# Altium PCB FPv1.3.2.PcbDoc (part 8 of 9)
Units mm, origin at the board's own origin, x right, y up, seen from the top; angles counter-clockwise.
Board outline 81.28 x 53.34 mm, 4 copper layers (Top Layer, GROUND PLANE, POWER PLANE, Bottom Layer); 98 components, 183 nets, 614 pads, 312 vias.
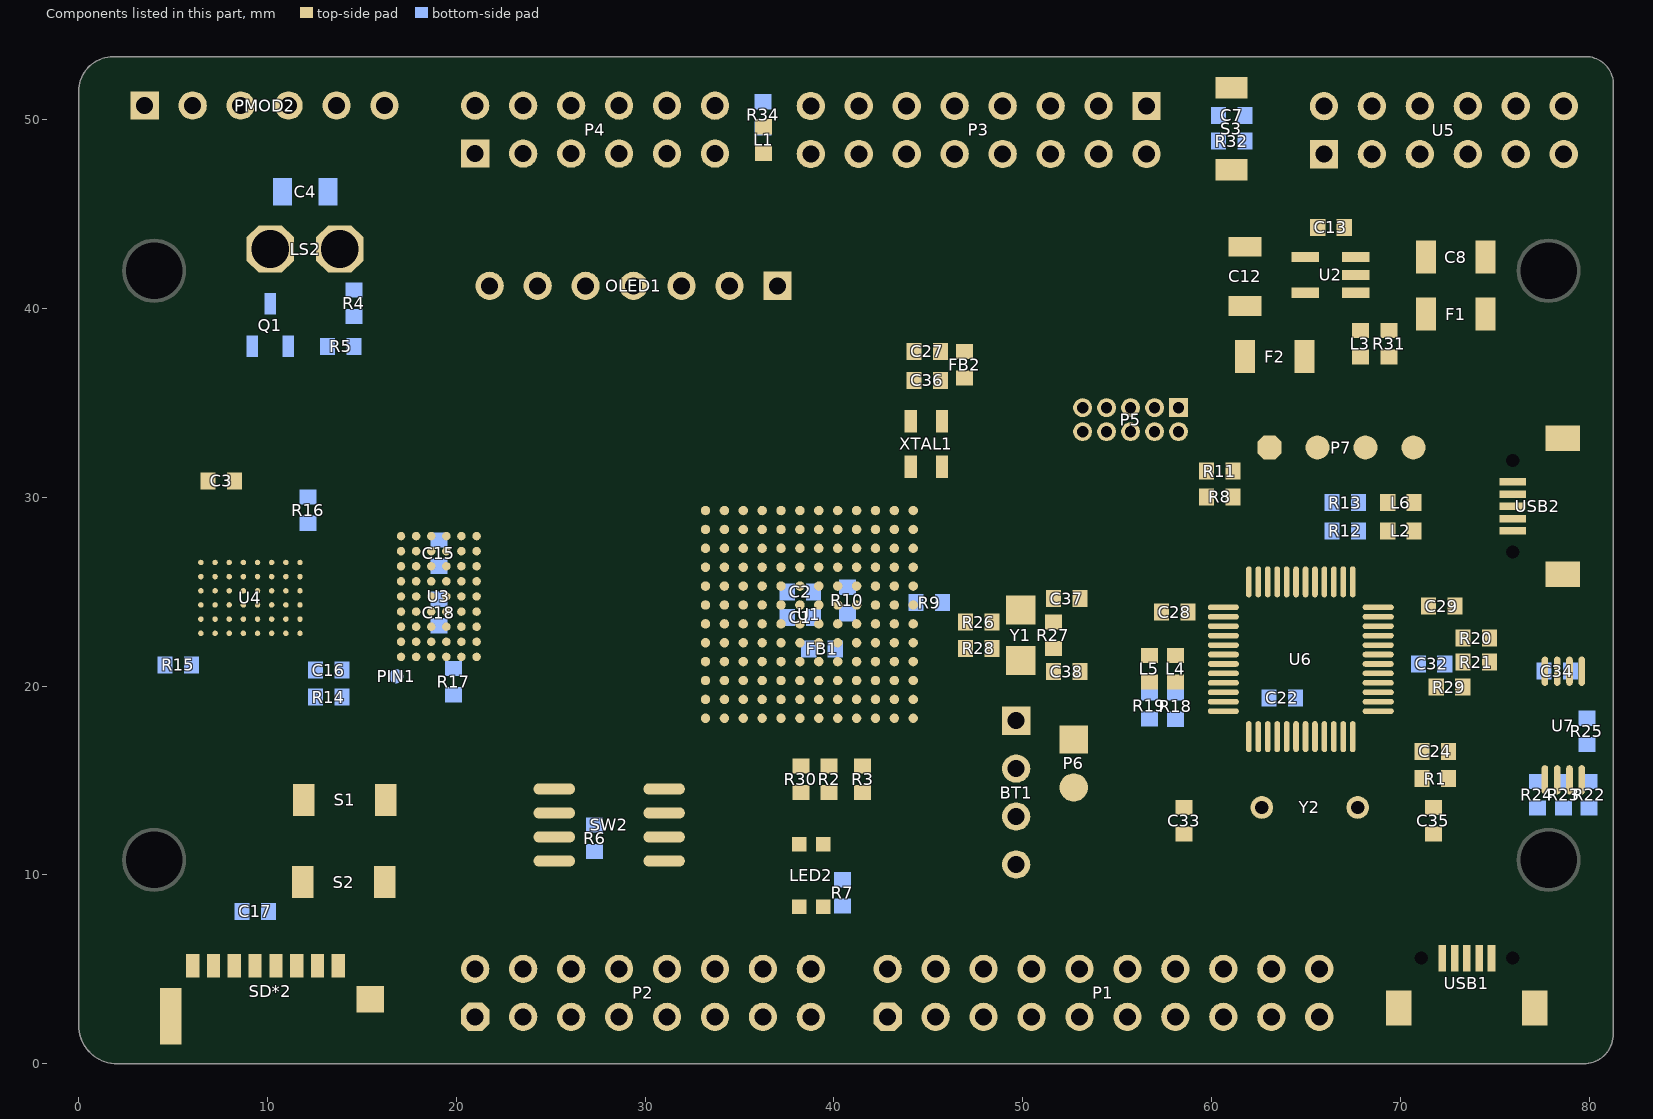
[diagram p10: the components of this part, seen from the top]

## Via types
v1: diameter 0.403, hole 0.2, Top Layer to Bottom Layer, tented both sides, 261 vias
v2: diameter 0.503, hole 0.3, Top Layer to Bottom Layer, tented both sides, 25 vias
v3: diameter 0.6, hole 0.4, Top Layer to Bottom Layer, tented both sides, 11 vias
v4: diameter 0.508, hole 0.33, Top Layer to Bottom Layer, tented both sides, 5 vias
v5: diameter 0.703, hole 0.4, Top Layer to Bottom Layer, tented both sides, 3 vias
v6: diameter 0.603, hole 0.4, Top Layer to Bottom Layer, tented both sides, 2 vias
v7: diameter 0.503, hole 0.25, Top Layer to Bottom Layer, tented both sides, 2 vias
v8: diameter 0.6, hole 0.24, Top Layer to Bottom Layer, tented both sides, 1 vias
v9: diameter 0.508, hole 0.349, Top Layer to Bottom Layer, tented both sides, 1 vias
v10: diameter 0.603, hole 0.3, Top Layer to Bottom Layer, tented both sides, 1 vias

## Nets (pads, with @x,y where several pads share a name; then routed paths per layer and width w, separated by ;. In a path a pad name is that pad's centre, name@x,y a point inside that pad or via, vN(x,y) a via of type N, cw(c..) or ccw(c..) an arc to the next point about the centre after c; other vN are vias at no path point) (continued)
copper on no net: (continued)
  Top Layer w0.025: 52.349,39.98 52.4,39.98 ; 52.349,40.005 52.4,40.005 ; 52.349,40.03 52.4,40.03 ; 52.349,40.056 52.4,40.056 ; 52.349,40.081 52.4,40.081 ; 52.349,40.107 52.4,40.107 ; 52.349,40.132 52.4,40.132 ; 52.349,40.157 52.4,40.157 ; 52.349,40.183 52.4,40.183 ; 52.349,40.208 52.4,40.208 ; 52.349,40.234 52.4,40.234 ; 52.349,40.259 52.4,40.259 ; 52.349,40.284 52.4,40.284 ; 52.349,40.31 52.4,40.31 ; 52.349,40.335 52.4,40.335 ; 52.349,40.361 52.4,40.361 ; 52.349,40.386 52.4,40.386 ; 52.375,39.7 52.426,39.7 ; 52.375,39.726 52.426,39.726 ; 52.375,39.751 52.426,39.751 ; 52.375,39.776 52.426,39.776 ; 52.375,39.802 52.426,39.802 ; 52.375,39.827 52.426,39.827 ; 52.375,39.853 52.426,39.853 ; 52.375,39.878 52.426,39.878 ; 52.375,39.903 52.426,39.903 ; 52.375,39.929 52.4,39.929 ; 52.375,39.954 52.4,39.954 ; 52.375,40.411 52.4,40.411 ; 52.375,40.437 52.4,40.437 ; 52.375,40.462 52.4,40.462 ; 52.375,40.488 52.426,40.488 ; 52.375,40.513 52.426,40.513 ; 52.375,40.538 52.426,40.538 ; 52.375,40.564 52.426,40.564 ; 52.375,40.589 52.426,40.589 ; 52.375,40.615 52.426,40.615 ; 52.375,40.64 52.426,40.64 ; 52.375,40.665 52.426,40.665 ; 52.4,39.522 52.451,39.522 ; 52.4,39.548 52.451,39.548 ; 52.4,39.573 52.451,39.573 ; 52.4,39.599 52.451,39.599 ; 52.4,39.624 52.451,39.624 ; 52.4,39.649 52.451,39.649 ; 52.4,39.675 52.426,39.675 ; 52.4,40.691 52.426,40.691 ; 52.4,40.716 52.451,40.716 ; 52.4,40.742 52.451,40.742 ; 52.4,40.767 52.451,40.767 ; 52.4,40.792 52.451,40.792 ; 52.4,40.818 52.451,40.818 ; 52.4,40.843 52.451,40.843 ; 52.426,39.395 52.476,39.395 ; 52.426,39.421 52.476,39.421 ; 52.426,39.446 52.476,39.446 ; 52.426,39.472 52.476,39.472 ; 52.426,39.497 52.476,39.497 ; 52.426,40.869 52.451,40.869 ; 52.426,40.894 52.476,40.894 ; 52.426,40.919 52.476,40.919 ; 52.426,40.945 52.476,40.945 ; 52.426,40.97 52.476,40.97 ; 52.451,39.294 52.502,39.294 ; 52.451,39.319 52.502,39.319 ; 52.451,39.345 52.502,39.345 ; 52.451,39.37 52.502,39.37 ; 52.451,40.996 52.476,40.996 ; 52.451,41.021 52.502,41.021 ; 52.451,41.046 52.502,41.046 ; 52.451,41.072 52.502,41.072 ; 52.451,41.097 52.502,41.097 ; 52.476,39.192 52.527,39.192 ; 52.476,39.218 52.527,39.218 ; 52.476,39.243 52.527,39.243 ; 52.476,39.268 52.527,39.268 ; 52.476,41.123 52.527,41.123 ; 52.476,41.148 52.527,41.148 ; 52.476,41.173 52.527,41.173 ; 52.476,41.199 52.527,41.199 ; 52.502,39.091 52.553,39.091 ; 52.502,39.116 52.553,39.116 ; 52.502,39.141 52.553,39.141 ; 52.502,39.167 52.553,39.167 ; 52.502,41.224 52.553,41.224 ; 52.502,41.25 52.553,41.25 ; 52.502,41.275 52.553,41.275 ; 52.527,39.014 52.578,39.014 ; 52.527,39.04 52.578,39.04 ; 52.527,39.065 52.578,39.065 ; 52.527,41.3 52.578,41.3 ; 52.527,41.326 52.578,41.326 ; 52.527,41.351 52.578,41.351 ; 52.527,41.377 52.603,41.377 ; 52.553,38.938 52.603,38.938 ; 52.553,38.964 52.603,38.964 ; 52.553,38.989 52.603,38.989 ; 52.553,41.402 52.603,41.402 ; 52.553,41.427 52.603,41.427 ; 52.553,41.453 52.629,41.453 ; 52.578,38.862 52.629,38.862 ; 52.578,38.887 52.629,38.887 ; 52.578,38.913 52.629,38.913 ; 52.578,41.478 52.629,41.478 ; 52.578,41.504 52.629,41.504 ; 52.578,41.529 52.654,41.529 ; 52.603,38.786 52.68,38.786 ; 52.603,38.811 52.654,38.811 ; 52.603,38.837 52.654,38.837 ; 52.603,41.554 52.654,41.554 ; 52.603,41.58 52.654,41.58 ; 52.629,38.735 52.68,38.735 ; 52.629,38.76 52.68,38.76 ; 52.629,40.259 52.68,40.259 ; 52.629,40.284 52.68,40.284 ; 52.629,40.31 52.68,40.31 ; 52.629,40.335 52.68,40.335 ; 52.629,40.361 52.68,40.361 ; 52.629,41.605 52.68,41.605 ; 52.629,41.631 52.68,41.631 ; 52.629,41.656 52.705,41.656 ; 52.654,38.659 52.73,38.659 ; 52.654,38.684 52.705,38.684 ; 52.654,38.71 52.705,38.71 ; 52.654,40.208 52.73,40.208 ; 52.654,40.234 52.705,40.234 ; 52.654,40.386 52.705,40.386 ; 52.654,40.411 52.73,40.411 ; 52.654,41.681 52.705,41.681 ; 52.654,41.707 52.705,41.707 ; 52.68,38.608 52.756,38.608 ; 52.68,38.633 52.73,38.633 ; 52.68,39.649 53.162,39.649 ; 52.68,39.675 53.137,39.675 ; 52.68,39.954 53.162,39.954 ; 52.68,39.98 53.162,39.98 ; 52.68,40.183 52.781,40.183 ; 52.68,40.437 53.111,40.437 ; 52.68,40.691 52.781,40.691 ; 52.68,40.716 52.807,40.716 ; 52.68,40.97 52.807,40.97 ; 52.68,40.996 52.781,40.996 ; 52.68,41.732 52.73,41.732 ; 52.68,41.758 52.73,41.758 ; 52.705,38.557 52.756,38.557 ; 52.705,38.583 52.756,38.583 ; 52.705,40.157 53.111,40.157 ; 52.705,40.462 53.111,40.462 ; 52.705,40.665 52.883,40.665 ; 52.705,41.021 52.857,41.021 ; 52.705,41.783 52.756,41.783 ; 52.705,41.808 52.756,41.808 ; 52.73,38.506 52.781,38.506 ; 52.73,38.532 52.781,38.532 ; 52.73,39.497 52.934,39.497 ; 52.73,39.522 52.807,39.522 ; 52.73,40.742 52.908,40.742 ; 52.73,40.945 52.908,40.945 ; 52.73,41.834 52.781,41.834 ; 52.73,41.859 52.781,41.859 ; 52.73,41.885 52.807,41.885 ; 52.756,38.456 52.807,38.456 ; 52.756,38.481 52.807,38.481 ; 52.756,40.132 53.111,40.132 ; 52.756,41.91 52.807,41.91 ; 52.756,41.935 52.832,41.935 ; 52.781,38.405 52.832,38.405 ; 52.781,38.43 52.832,38.43 ; 52.781,39.141 52.832,39.141 ; 52.781,39.167 52.883,39.167 ; 52.781,41.046 52.984,41.046 ; 52.781,41.961 52.832,41.961 ; 52.781,41.986 52.857,41.986 ; 52.807,38.354 52.883,38.354 ; 52.807,38.379 52.857,38.379 ; 52.807,39.192 52.908,39.192 ; 52.807,39.472 53.061,39.472 ; 52.807,40.64 52.984,40.64 ; 52.807,42.012 52.857,42.012 ; 52.832,38.303 52.908,38.303 ; 52.832,38.329 52.883,38.329 ; 52.832,39.014 52.959,39.014 ; 52.832,40.767 53.01,40.767 ; 52.832,40.919 53.01,40.919 ; 52.832,42.037 52.883,42.037 ; 52.832,42.062 52.883,42.062 ; 52.857,38.252 52.934,38.252 ; 52.857,38.278 52.908,38.278 ; 52.857,38.989 52.883,38.989 ; 52.857,39.04 53.01,39.04 ; 52.857,39.218 52.959,39.218 ; 52.857,42.088 52.908,42.088 ; 52.857,42.113 52.908,42.113 ; 52.883,38.227 52.934,38.227 ; 52.883,39.243 53.01,39.243 ; 52.883,39.395 52.934,39.395 ; 52.883,39.421 52.934,39.421 ; 52.883,39.446 53.188,39.446 ; 52.883,41.072 53.086,41.072 ; 52.883,42.139 52.934,42.139 ; 52.883,42.164 52.959,42.164 ; 52.908,38.176 52.984,38.176 ; 52.908,38.202 52.959,38.202 ; 52.908,39.268 53.035,39.268 ; 52.908,39.294 52.959,39.294 ; 52.908,39.319 52.959,39.319 ; 52.908,39.345 52.934,39.345 ; 52.908,39.37 52.934,39.37 ; 52.908,39.7 52.959,39.7 ; 52.908,39.726 52.959,39.726 ; 52.908,39.751 52.959,39.751 ; 52.908,39.776 52.959,39.776 ; 52.908,39.802 52.959,39.802 ; 52.908,39.827 52.959,39.827 ; 52.908,39.853 52.959,39.853 ; 52.908,39.878 52.959,39.878 ; 52.908,39.903 52.959,39.903 ; 52.908,39.929 52.959,39.929 ; 52.908,40.615 53.086,40.615 ; 52.908,42.189 52.959,42.189 ; 52.934,38.125 53.01,38.125 ; 52.934,38.151 52.984,38.151 ; 52.934,39.065 53.086,39.065 ; 52.934,40.792 53.086,40.792 ; 52.934,40.894 53.086,40.894 ; 52.934,42.215 52.984,42.215 ; 52.934,42.24 53.01,42.24 ; 52.959,38.1 53.01,38.1 ; 52.959,38.71 53.035,38.71 ; 52.959,38.735 53.086,38.735 ; 52.959,38.76 53.162,38.76 ; 52.959,42.266 53.01,42.266 ; 52.959,42.291 53.035,42.291 ; 52.984,38.049 53.061,38.049 ; 52.984,38.075 53.035,38.075 ; 52.984,38.786 53.061,38.786 ; 52.984,38.811 53.061,38.811 ; 52.984,39.091 53.137,39.091 ; 52.984,39.294 53.086,39.294 ; 52.984,40.589 53.162,40.589 ; 52.984,41.097 53.162,41.097 ; 52.984,42.316 53.035,42.316 ; 53.01,38.024 53.061,38.024 ; 53.01,38.837 53.086,38.837 ; 53.01,40.818 53.162,40.818 ; 53.01,40.869 53.137,40.869 ; 53.01,42.342 53.061,42.342 ; 53.01,42.367 53.086,42.367 ; 53.035,37.973 53.111,37.973 ; 53.035,37.998 53.086,37.998 ; 53.035,38.862 53.086,38.862 ; 53.035,38.887 53.111,38.887 ; 53.035,39.319 53.137,39.319 ; 53.035,42.393 53.111,42.393 ; 53.061,37.948 53.137,37.948 ; 53.061,38.913 53.137,38.913 ; 53.061,39.116 53.264,39.116 ; 53.061,39.345 53.162,39.345 ; 53.061,39.421 53.213,39.421 ; 53.061,42.418 53.111,42.418 ; 53.061,42.443 53.137,42.443 ; 53.086,37.897 53.162,37.897 ; 53.086,37.922 53.137,37.922 ; 53.086,38.786 53.213,38.786 ; 53.086,38.938 53.137,38.938 ; 53.086,38.964 53.162,38.964 ; 53.086,40.564 53.162,40.564 ; 53.086,40.843 53.137,40.843 ; 53.086,41.123 53.162,41.123 ; 53.086,42.469 53.162,42.469 ; 53.111,37.871 53.188,37.871 ; 53.111,38.989 53.188,38.989 ; 53.111,39.141 53.289,39.141 ; 53.111,39.37 53.213,39.37 ; 53.111,42.494 53.162,42.494 ; 53.137,37.846 53.213,37.846 ; 53.137,38.811 53.289,38.811 ; 53.137,39.014 53.188,39.014 ; 53.137,42.52 53.188,42.52 ; 53.137,42.545 53.213,42.545 ; 53.162,37.821 53.213,37.821 ; 53.162,39.04 53.213,39.04 ; 53.162,39.065 53.238,39.065 ; 53.162,39.395 53.213,39.395 ; 53.162,42.57 53.238,42.57 ; 53.188,37.77 53.264,37.77 ; 53.188,37.795 53.238,37.795 ; 53.188,38.227 53.264,38.227 ; 53.188,38.252 53.238,38.252 ; 53.188,38.278 53.238,38.278 ; 53.188,38.303 53.238,38.303 ; 53.188,38.329 53.264,38.329 ; 53.188,39.091 53.264,39.091 ; 53.188,39.167 53.289,39.167 ; 53.188,42.596 53.264,42.596 ; 53.213,37.744 53.289,37.744 ; 53.213,38.176 53.289,38.176 ; 53.213,38.202 53.264,38.202 ; 53.213,38.354 53.289,38.354 ; 53.213,38.837 53.34,38.837 ; 53.213,42.621 53.264,42.621 ; 53.238,37.719 53.315,37.719 ; 53.238,38.151 53.315,38.151 ; 53.238,38.379 53.315,38.379 ; 53.238,39.192 53.264,39.192 ; 53.238,42.647 53.289,42.647 ; 53.238,42.672 53.315,42.672 ; 53.264,37.694 53.315,37.694 ; 53.264,38.125 53.492,38.125 ; 53.264,38.405 53.34,38.405 ; 53.264,38.862 53.391,38.862 ; 53.264,42.697 53.34,42.697 ; 53.289,37.643 53.365,37.643 ; 53.289,37.668 53.34,37.668 ; 53.289,38.43 53.365,38.43 ; 53.289,42.723 53.365,42.723 ; 53.315,37.617 53.391,37.617 ; 53.315,38.1 53.442,38.1 ; 53.315,38.456 53.391,38.456 ; 53.315,42.748 53.391,42.748 ; 53.34,37.592 53.416,37.592 ; 53.34,38.481 53.416,38.481 ; 53.34,38.887 53.391,38.887 ; 53.34,42.774 53.416,42.774 ; 53.365,37.567 53.442,37.567 ; 53.365,38.506 53.442,38.506 ; 53.365,42.799 53.416,42.799 ; 53.391,37.541 53.467,37.541 ; 53.391,38.532 53.467,38.532 ; 53.391,39.903 53.67,39.903 ; 53.391,39.929 53.67,39.929 ; 53.391,39.954 53.67,39.954 ; 53.391,39.98 53.67,39.98 ; 53.391,40.005 53.67,40.005 ; 53.391,40.03 53.67,40.03 ; 53.391,40.056 53.67,40.056 ; 53.391,40.081 53.67,40.081 ; 53.391,40.107 53.67,40.107 ; 53.391,40.132 53.696,40.132 ; 53.391,40.157 53.696,40.157 ; 53.391,40.183 53.696,40.183 ; 53.391,40.208 53.696,40.208 ; 53.391,40.234 53.696,40.234 ; 53.391,40.259 53.721,40.259 ; 53.391,40.284 53.721,40.284 ; 53.391,40.31 53.721,40.31 ; 53.391,40.335 53.721,40.335 ; 53.391,40.361 53.746,40.361 ; 53.391,40.386 53.746,40.386 ; 53.391,40.411 53.746,40.411 ; 53.391,40.437 53.772,40.437 ; 53.391,40.462 53.772,40.462 ; 53.391,42.824 53.442,42.824 ; 53.416,37.516 53.492,37.516 ; 53.416,38.151 53.518,38.151 ; 53.416,38.557 53.492,38.557 ; 53.416,39.726 53.645,39.726 ; 53.416,39.751 53.645,39.751 ; 53.416,39.776 53.645,39.776 ; 53.416,39.802 53.645,39.802 ; 53.416,39.827 53.645,39.827 ; 53.416,39.853 53.645,39.853 ; 53.416,39.878 53.645,39.878 ; 53.416,40.488 53.772,40.488 ; 53.416,40.513 53.797,40.513 ; 53.416,40.538 53.797,40.538 ; 53.416,40.564 53.797,40.564 ; 53.416,40.589 53.823,40.589 ; 53.416,40.615 53.823,40.615 ; 53.416,40.64 53.848,40.64 ; 53.416,40.665 53.848,40.665 ; 53.416,42.85 53.467,42.85 ; 53.416,42.875 53.492,42.875 ; 53.442,37.49 53.518,37.49 ; 53.442,37.922 53.518,37.922 ; 53.442,38.583 53.492,38.583 ; 53.442,39.573 53.67,39.573 ; 53.442,39.599 53.67,39.599 ; 53.442,39.624 53.645,39.624 ; 53.442,39.649 53.645,39.649 ; 53.442,39.675 53.645,39.675 ; 53.442,39.7 53.645,39.7 ; 53.442,40.691 53.848,40.691 ; 53.442,40.716 53.873,40.716 ; 53.442,40.742 53.873,40.742 ; 53.442,40.767 53.899,40.767 ; 53.442,40.792 53.899,40.792 ; 53.442,42.901 53.518,42.901 ; 53.467,37.465 53.543,37.465 ; 53.467,37.897 53.492,37.897 ; 53.467,37.948 53.543,37.948 ; 53.467,38.176 53.543,38.176 ; 53.467,39.472 53.67,39.472 ; 53.467,39.497 53.67,39.497 ; 53.467,39.522 53.67,39.522 ; 53.467,39.548 53.67,39.548 ; 53.467,40.818 53.924,40.818 ; 53.467,40.843 53.924,40.843 ; 53.467,40.869 53.95,40.869 ; 53.467,40.894 53.95,40.894 ; 53.467,42.926 53.543,42.926 ; 53.492,37.44 53.569,37.44 ; 53.492,37.973 53.569,37.973 ; 53.492,38.202 53.569,38.202 ; 53.492,39.395 53.696,39.395 ; 53.492,39.421 53.67,39.421 ; 53.492,39.446 53.67,39.446 ; 53.492,40.919 53.975,40.919 ; 53.492,40.945 53.975,40.945 ; 53.492,40.97 54,40.97 ; 53.492,40.996 54.026,40.996 ; 53.492,42.951 53.569,42.951 ; 53.518,37.414 53.594,37.414 ; 53.518,37.998 53.594,37.998 ; 53.518,38.227 53.594,38.227 ; 53.518,39.294 53.721,39.294 ; 53.518,39.319 53.696,39.319 ; 53.518,39.345 53.696,39.345 ; 53.518,39.37 53.696,39.37 ; 53.518,41.021 54.026,41.021 ; 53.518,41.046 54.051,41.046 ; 53.518,41.072 54.051,41.072 ; 53.518,42.977 53.594,42.977 ; 53.543,37.389 53.619,37.389 ; 53.543,38.024 53.619,38.024 ; 53.543,38.252 53.619,38.252 ; 53.543,39.243 53.721,39.243 ; 53.543,39.268 53.721,39.268 ; 53.543,41.097 54.077,41.097 ; 53.543,41.123 54.102,41.123 ; 53.543,41.148 54.102,41.148 ; 53.543,43.002 53.619,43.002 ; 53.569,37.363 53.645,37.363 ; 53.569,38.049 53.645,38.049 ; 53.569,38.278 53.645,38.278 ; 53.569,39.167 53.746,39.167 ; 53.569,39.192 53.746,39.192 ; 53.569,39.218 53.721,39.218 ; 53.569,41.173 54.127,41.173 ; 53.569,41.199 54.153,41.199 ; 53.569,41.224 54.178,41.224 ; 53.569,42.799 53.696,42.799 ; 53.569,42.824 53.696,42.824 ; 53.569,43.028 53.645,43.028 ; 53.594,37.338 53.67,37.338 ; 53.594,38.075 53.67,38.075 ; 53.594,38.303 53.67,38.303 ; 53.594,39.091 53.772,39.091 ; 53.594,39.116 53.772,39.116 ; 53.594,39.141 53.746,39.141 ; 53.594,41.25 54.178,41.25 ; 53.594,41.275 54.204,41.275 ; 53.594,42.774 53.721,42.774 ; 53.594,42.85 53.645,42.85 ; 53.619,37.313 53.696,37.313 ; 53.619,38.1 53.696,38.1 ; 53.619,38.329 53.696,38.329 ; 53.619,39.04 53.797,39.04 ; 53.619,39.065 53.772,39.065 ; 53.619,41.3 54.229,41.3 ; 53.619,41.326 54.254,41.326 ; 53.619,42.189 53.721,42.189 ; 53.619,42.215 53.721,42.215 ; 53.619,42.24 53.721,42.24 ; 53.619,42.469 53.696,42.469 ; 53.619,42.748 53.746,42.748 ; 53.619,43.053 53.696,43.053 ; 53.645,37.287 53.721,37.287 ; 53.645,38.125 53.721,38.125 ; 53.645,38.354 53.721,38.354 ; 53.645,38.989 53.823,38.989 ; 53.645,39.014 53.797,39.014 ; 53.645,41.351 54.254,41.351 ; 53.645,41.377 54.28,41.377 ; 53.645,41.402 54.305,41.402 ; 53.645,42.266 53.746,42.266 ; 53.645,42.494 53.721,42.494 ; 53.645,42.52 53.721,42.52 ; 53.645,42.723 53.746,42.723 ; 53.645,43.078 53.721,43.078 ; 53.67,37.262 53.746,37.262 ; 53.67,37.694 53.721,37.694 ; 53.67,37.719 53.746,37.719 ; 53.67,37.744 53.772,37.744 ; 53.67,37.77 53.797,37.77 ; 53.67,37.795 53.823,37.795 ; 53.67,38.151 53.797,38.151 ; 53.67,38.379 53.696,38.379 ; 53.67,38.938 53.823,38.938 ; 53.67,38.964 53.823,38.964 ; 53.67,41.427 54.331,41.427 ; 53.67,41.453 54.356,41.453 ; 53.67,42.291 53.746,42.291 ; 53.67,42.316 53.746,42.316 ; 53.67,42.545 53.721,42.545 ; 53.67,42.57 53.746,42.57 ; 53.67,42.596 53.721,42.596 ; 53.67,42.697 53.772,42.697 ; 53.67,43.104 53.746,43.104 ; 53.696,37.236 53.797,37.236 ; 53.696,37.821 53.746,37.821 ; 53.696,37.846 53.746,37.846 ; 53.696,37.871 53.746,37.871 ; 53.696,37.897 53.746,37.897 ; 53.696,37.922 53.746,37.922 ; 53.696,38.176 53.797,38.176 ; 53.696,38.887 53.873,38.887 ; 53.696,38.913 53.848,38.913 ; 53.696,41.478 54.381,41.478 ; 53.696,41.504 54.407,41.504 ; 53.696,42.342 53.797,42.342 ; 53.696,42.672 53.772,42.672 ; 53.696,43.129 53.772,43.129 ; 53.721,37.948 53.772,37.948 ; 53.721,37.973 53.772,37.973 ; 53.721,37.998 53.772,37.998 ; 53.721,38.024 53.772,38.024 ; 53.721,38.049 53.772,38.049 ; 53.721,38.202 53.823,38.202 ; 53.721,38.837 53.899,38.837 ; 53.721,38.862 53.873,38.862 ; 53.721,41.529 54.432,41.529 ; 53.721,41.554 54.458,41.554 ; 53.721,42.367 53.772,42.367 ; 53.721,42.393 53.797,42.393 ; 53.721,42.647 53.797,42.647 ; 53.721,43.155 53.797,43.155 ; 53.746,37.211 53.823,37.211 ; 53.746,38.075 53.797,38.075 ; 53.746,38.1 53.797,38.1 ; 53.746,38.125 53.797,38.125 ; 53.746,38.227 53.797,38.227 ; 53.746,38.786 53.95,38.786 ; 53.746,38.811 53.924,38.811 ; 53.746,41.58 54.483,41.58 ; 53.746,42.418 53.873,42.418 ; 53.746,42.443 53.848,42.443 ; 53.746,42.621 53.823,42.621 ; 53.746,43.18 53.823,43.18 ; 53.772,37.186 53.848,37.186 ; 53.772,37.821 53.848,37.821 ; 53.772,38.735 54,38.735 ; 53.772,38.76 53.975,38.76 ; 53.772,41.605 54.508,41.605 ; 53.772,41.631 54.534,41.631 ; 53.772,42.164 53.823,42.164 ; 53.772,42.189 53.797,42.189 ; 53.772,42.469 53.848,42.469 ; 53.772,42.494 53.924,42.494 ; 53.772,42.57 53.873,42.57 ; 53.772,42.596 53.899,42.596 ; 53.772,43.205 53.873,43.205 ; 53.797,37.16 53.873,37.16 ; 53.797,37.846 53.873,37.846 ; 53.797,38.71 54.026,38.71 ; 53.797,41.656 54.559,41.656 ; 53.797,41.681 54.585,41.681 ; 53.797,41.91 53.873,41.91 ; 53.797,41.935 53.899,41.935 ; 53.797,42.088 53.823,42.088 ; 53.797,42.113 53.848,42.113 ; 53.797,42.139 53.848,42.139 ; 53.797,42.24 53.848,42.24 ; 53.797,42.266 53.873,42.266 ; 53.797,42.291 53.873,42.291 ; 53.797,42.316 53.873,42.316 ; 53.797,42.52 53.899,42.52 ; 53.797,42.545 53.873,42.545 ; 53.797,42.799 53.924,42.799 ; 53.823,37.135 53.924,37.135 ; 53.823,37.871 53.899,37.871 ; 53.823,38.659 54.102,38.659 ; 53.823,38.684 54.051,38.684 ; 53.823,41.707 54.61,41.707 ; 53.823,41.961 53.899,41.961 ; 53.823,41.986 53.924,41.986 ; 53.823,42.012 53.924,42.012 ; 53.823,42.342 54,42.342 ; 53.823,42.393 53.899,42.393 ; 53.823,42.774 53.924,42.774 ; 53.823,43.231 53.899,43.231 ; 53.848,37.516 53.873,37.516 ; 53.848,37.541 53.899,37.541 ; 53.848,37.567 53.924,37.567 ; 53.848,37.897 53.924,37.897 ; 53.848,38.633 54.127,38.633 ; 53.848,41.732 54.661,41.732 ; 53.848,41.758 54.686,41.758 ; 53.848,42.037 53.95,42.037 ; 53.848,42.062 53.95,42.062 ; 53.848,42.367 54.178,42.367 ; 53.848,42.621 53.899,42.621 ; 53.848,42.748 53.924,42.748 ; 53.848,43.256 53.924,43.256 ; 53.873,37.109 53.95,37.109 ; 53.873,37.592 53.95,37.592 ; 53.873,37.922 53.95,37.922 ; 53.873,38.583 54.229,38.583 ; 53.873,38.608 54.178,38.608 ; 53.873,41.783 54.712,41.783 ; 53.873,42.088 53.95,42.088 ; 53.873,42.469 53.95,42.469 ; 53.873,42.723 53.924,42.723 ; 53.873,43.282 53.975,43.282 ; 53.899,37.084 53.975,37.084 ; 53.899,37.617 53.975,37.617 ; 53.899,37.948 53.975,37.948 ; 53.899,38.557 54.305,38.557 ; 53.899,41.808 54.762,41.808 ; 53.899,41.834 54.788,41.834 ; 53.899,42.113 53.95,42.113 ; 53.899,42.139 53.95,42.139 ; 53.899,42.164 53.975,42.164 ; 53.899,42.316 53.975,42.316 ; 53.899,42.443 53.975,42.443 ; 53.899,42.697 53.924,42.697 ; 53.899,43.307 54,43.307 ; 53.924,37.059 54.026,37.059 ; 53.924,37.643 54.026,37.643 ; 53.924,37.973 54,37.973 ; 53.924,38.506 54.508,38.506 ; 53.924,38.532 54.381,38.532 ; 53.924,41.859 54.813,41.859 ; 53.924,42.189 53.975,42.189 ; 53.924,42.215 53.975,42.215 ; 53.924,42.24 53.975,42.24 ; 53.924,42.291 53.975,42.291 ; 53.924,42.418 54,42.418 ; 53.95,37.033 54.051,37.033 ; 53.95,37.668 54.026,37.668 ; 53.95,37.998 54.026,37.998 ; 53.95,38.481 57.455,38.481 ; 53.95,41.885 54.864,41.885 ; 53.95,41.91 54.915,41.91 ; 53.95,42.266 53.975,42.266 ; 53.95,42.393 54.026,42.393 ; 53.95,43.332 54.026,43.332 ; 53.975,37.694 54.051,37.694 ; 53.975,38.024 54,38.024 ; 53.975,38.456 57.429,38.456 ; 53.975,41.935 54.966,41.935 ; 53.975,43.358 54.077,43.358 ; 54,37.008 54.077,37.008 ; 54,37.719 54.077,37.719 ; 54,38.405 57.404,38.405 ; 54,38.43 57.429,38.43 ; 54,41.961 54.991,41.961 ; 54.026,36.982 54.127,36.982 ; 54.026,37.744 54.102,37.744 ; 54.026,38.379 57.379,38.379 ; 54.026,41.986 56.032,41.986 ; 54.026,42.342 54.178,42.342 ; 54.026,42.494 54.077,42.494 ; 54.026,42.52 54.051,42.52 ; 54.026,43.383 54.102,43.383 ; 54.051,37.313 54.178,37.313 ; 54.051,37.338 54.229,37.338 ; 54.051,37.77 54.153,37.77 ; 54.051,38.354 57.379,38.354 ; 54.051,42.012 56.058,42.012 ; 54.051,42.037 56.109,42.037 ; 54.051,42.393 54.153,42.393 ; 54.051,42.418 54.127,42.418 ; 54.051,42.443 54.127,42.443 ; 54.051,42.469 54.102,42.469 ; 54.051,43.409 54.153,43.409 ; 54.077,36.957 54.153,36.957 ; 54.077,37.287 54.127,37.287 ; 54.077,37.363 54.127,37.363 ; 54.077,37.389 54.127,37.389 ; 54.077,37.795 54.153,37.795 ; 54.077,38.329 57.353,38.329 ; 54.077,42.062 56.134,42.062 ; 54.077,42.316 54.204,42.316 ; 54.102,36.932 54.204,36.932 ; 54.102,37.414 54.153,37.414 ; 54.102,37.44 54.153,37.44 ; 54.102,37.465 54.153,37.465 ; 54.102,37.821 54.178,37.821 ; 54.102,38.303 57.353,38.303 ; 54.102,42.088 56.159,42.088 ; 54.102,42.266 54.204,42.266 ; 54.102,42.291 54.204,42.291 ; 54.102,43.434 54.178,43.434 ; 54.127,37.49 54.178,37.49 ; 54.127,37.516 54.178,37.516 ; 54.127,37.541 54.178,37.541 ; 54.127,37.846 54.204,37.846 ; 54.127,38.252 57.302,38.252 ; 54.127,38.278 57.328,38.278 ; 54.127,42.113 56.21,42.113 ; 54.127,43.459 54.229,43.459 ; 54.153,36.906 54.254,36.906 ; 54.153,37.567 54.204,37.567 ; 54.153,37.592 54.204,37.592 ; 54.153,37.617 54.229,37.617 ; 54.153,38.227 57.277,38.227 ; 54.153,42.139 56.236,42.139 ; 54.153,42.24 54.204,42.24 ; 54.178,36.881 54.28,36.881 ; 54.178,37.363 54.254,37.363 ; 54.178,37.643 54.229,37.643 ; 54.178,37.668 54.229,37.668 ; 54.178,37.694 54.254,37.694 ; 54.178,38.202 57.277,38.202 ; 54.178,42.164 56.261,42.164 ; 54.178,43.485 54.254,43.485 ; 54.204,37.389 54.305,37.389 ; 54.204,37.719 54.254,37.719 ; 54.204,37.744 54.254,37.744 ; 54.204,37.77 54.254,37.77 ; 54.204,38.176 57.252,38.176 ; 54.204,42.189 56.312,42.189 ; 54.204,43.51 54.305,43.51 ; 54.229,36.855 54.331,36.855 ; 54.229,38.151 57.226,38.151 ; 54.229,42.215 56.337,42.215 ; 54.254,37.414 54.356,37.414 ; 54.254,38.125 57.201,38.125 ; 54.254,42.24 56.388,42.24 ; 54.254,43.536 54.356,43.536 ; 54.28,36.83 54.381,36.83 ; 54.28,38.1 57.201,38.1 ; 54.28,42.266 56.413,42.266 ; 54.305,36.805 54.407,36.805 ; 54.305,37.109 54.381,37.109 ; 54.305,37.44 54.407,37.44 ; 54.305,38.075 57.175,38.075 ; 54.305,42.291 56.464,42.291 ; 54.305,43.561 54.407,43.561 ; 54.331,37.084 54.432,37.084 ; 54.331,37.135 54.407,37.135 ; 54.331,38.049 57.15,38.049 ; 54.331,42.316 56.49,42.316 ; 54.331,43.586 54.458,43.586 ; 54.356,36.779 54.458,36.779 ; 54.356,37.16 54.432,37.16 ; 54.356,37.186 54.432,37.186 ; 54.356,37.465 54.458,37.465 ; 54.356,42.342 56.54,42.342 ; 54.381,37.059 54.458,37.059 ; 54.381,37.211 54.458,37.211 ; 54.381,38.024 57.125,38.024 ; 54.381,42.367 56.591,42.367 ; 54.381,43.612 54.483,43.612 ; 54.407,36.754 54.508,36.754 ; 54.407,37.033 54.483,37.033 ; 54.407,37.236 54.585,37.236 ; 54.407,37.49 54.508,37.49 ; 54.407,37.998 57.099,37.998 ; 54.407,42.393 56.617,42.393 ; 54.432,37.008 54.534,37.008 ; 54.432,37.262 54.534,37.262 ; 54.432,37.516 54.534,37.516 ; 54.432,37.973 57.074,37.973 ; 54.432,43.383 54.508,43.383 ; 54.432,43.409 54.483,43.409 ; 54.432,43.434 54.458,43.434 ; 54.432,43.637 54.534,43.637 ; 54.458,36.728 54.559,36.728 ; 54.458,36.982 54.559,36.982 ; 54.458,37.287 54.534,37.287 ; 54.458,37.313 54.534,37.313 ; 54.458,37.948 57.048,37.948 ; 54.458,42.418 56.667,42.418 ; 54.458,43.256 54.534,43.256 ; 54.458,43.282 54.534,43.282 ; 54.458,43.307 54.508,43.307 ; 54.458,43.332 54.508,43.332 ; 54.458,43.358 54.508,43.358 ; 54.483,37.338 54.559,37.338 ; 54.483,37.541 54.508,37.541 ; 54.483,42.443 56.718,42.443 ; 54.483,43.231 54.508,43.231 ; 54.483,43.663 54.585,43.663 ; 54.508,36.703 54.61,36.703 ; 54.508,36.957 54.585,36.957 ; 54.508,37.363 54.585,37.363 ; 54.508,37.922 57.023,37.922 ; 54.508,42.469 56.769,42.469 ; 54.508,43.155 54.61,43.155 ; 54.534,36.932 54.61,36.932 ; 54.534,37.211 54.61,37.211 ; 54.534,37.389 54.61,37.389 ; 54.534,37.414 54.686,37.414 ; 54.534,37.897 56.998,37.897 ; 54.534,40.284 54.966,40.284 ; 54.534,40.31 54.966,40.31 ; 54.534,40.335 54.991,40.335 ; 54.534,40.361 54.991,40.361 ; 54.534,43.078 54.635,43.078 ; 54.534,43.104 54.635,43.104 ; 54.534,43.129 54.61,43.129 ; 54.534,43.18 54.559,43.18 ; 54.534,43.688 54.661,43.688 ; 54.559,36.678 54.686,36.678 ; 54.559,36.906 54.585,36.906 ; 54.559,37.186 54.635,37.186 ; 54.559,37.44 54.635,37.44 ; 54.559,37.871 56.972,37.871 ; 54.559,39.98 54.94,39.98 ; 54.559,40.005 54.94,40.005 ; 54.559,40.03 54.94,40.03 ; 54.559,40.056 54.94,40.056 ; 54.559,40.081 54.94,40.081 ; 54.559,40.107 54.966,40.107 ; 54.559,40.132 54.966,40.132 ; 54.559,40.157 54.966,40.157 ; 54.559,40.183 54.966,40.183 ; 54.559,40.208 54.966,40.208 ; 54.559,40.234 54.966,40.234 ; 54.559,40.259 54.966,40.259 ; 54.559,40.386 54.991,40.386 ; 54.559,40.411 54.991,40.411 ; 54.559,40.437 55.016,40.437 ; 54.559,40.462 55.016,40.462 ; 54.559,40.488 55.016,40.488 ; 54.559,40.513 55.016,40.513 ; 54.559,40.538 55.042,40.538 ; 54.559,40.564 55.042,40.564 ; 54.559,40.589 55.042,40.589 ; 54.559,40.615 55.067,40.615 ; 54.559,40.64 55.067,40.64 ; 54.559,40.665 55.067,40.665 ; 54.559,40.691 55.093,40.691 ; 54.559,42.494 56.82,42.494 ; 54.559,42.926 54.661,42.926 ; 54.559,42.951 54.661,42.951 ; 54.559,42.977 54.661,42.977 ; 54.559,43.002 54.661,43.002 ; 54.559,43.028 54.635,43.028 ; 54.559,43.053 54.635,43.053 ; 54.585,37.16 54.686,37.16 ; 54.585,37.465 54.61,37.465 ; 54.585,39.853 54.966,39.853 ; 54.585,39.878 54.94,39.878 ; 54.585,39.903 54.94,39.903 ; 54.585,39.929 54.94,39.929 ; 54.585,39.954 54.94,39.954 ; 54.585,40.716 55.093,40.716 ; 54.585,40.742 55.093,40.742 ; 54.585,40.767 55.118,40.767 ; 54.585,40.792 55.118,40.792 ; 54.585,40.818 55.143,40.818 ; 54.585,40.843 55.143,40.843 ; 54.585,42.52 56.871,42.52 ; 54.585,42.85 54.661,42.85 ; 54.585,42.875 54.661,42.875 ; 54.585,42.901 54.661,42.901 ; 54.585,43.713 54.712,43.713 ; 54.61,36.652 54.737,36.652 ; 54.61,37.846 56.947,37.846 ; 54.61,39.776 54.966,39.776 ; 54.61,39.802 54.966,39.802 ; 54.61,39.827 54.966,39.827 ; 54.61,40.869 55.143,40.869 ; 54.61,40.894 55.169,40.894 ; 54.61,40.919 55.169,40.919 ; 54.61,40.945 55.194,40.945 ; 54.61,40.97 55.194,40.97 ; 54.61,42.545 56.921,42.545 ; 54.61,42.723 54.686,42.723 ; 54.61,42.748 54.686,42.748 ; 54.61,42.774 54.686,42.774 ; 54.61,42.799 54.686,42.799 ; 54.61,42.824 54.661,42.824 ; 54.61,43.256 54.635,43.256 ; 54.61,43.282 54.712,43.282 ; 54.635,37.135 54.712,37.135 ; 54.635,37.389 54.712,37.389 ; 54.635,37.821 56.921,37.821 ; 54.635,39.675 54.966,39.675 ; 54.635,39.7 54.966,39.7 ; 54.635,39.726 54.966,39.726 ; 54.635,39.751 54.966,39.751 ; 54.635,40.996 55.22,40.996 ; 54.635,41.021 55.245,41.021 ; 54.635,41.046 55.245,41.046 ; 54.635,41.072 55.27,41.072 ; 54.635,43.307 54.712,43.307 ; 54.635,43.739 54.762,43.739 ; 54.661,36.627 54.788,36.627 ; 54.661,37.109 54.712,37.109 ; 54.661,37.363 54.737,37.363 ; 54.661,39.624 54.991,39.624 ; 54.661,39.649 54.991,39.649 ; 54.661,41.097 55.27,41.097 ; 54.661,41.123 55.296,41.123 ; 54.661,41.148 55.296,41.148 ; 54.661,42.57 56.972,42.57 ; 54.661,43.332 54.864,43.332 ; 54.661,43.358 54.864,43.358 ; 54.661,43.434 54.788,43.434 ; 54.661,43.459 54.788,43.459 ; 54.661,43.536 54.712,43.536 ; 54.686,37.338 54.762,37.338 ; 54.686,37.795 56.896,37.795 ; 54.686,39.548 55.016,39.548 ; 54.686,39.573 54.991,39.573 ; 54.686,39.599 54.991,39.599 ; 54.686,41.173 55.321,41.173 ; 54.686,41.199 55.347,41.199 ; 54.686,41.224 55.347,41.224 ; 54.686,42.596 57.023,42.596 ; 54.686,43.383 54.839,43.383 ; 54.686,43.409 54.788,43.409 ; 54.686,43.51 54.788,43.51 ; 54.712,36.601 54.864,36.601 ; 54.712,37.77 56.871,37.77 ; 54.712,39.497 55.016,39.497 ; 54.712,39.522 55.016,39.522 ; 54.712,41.25 55.372,41.25 ; 54.712,41.275 55.397,41.275 ; 54.712,41.3 55.397,41.3 ; 54.712,43.053 54.762,43.053 ; 54.712,43.078 54.788,43.078 ; 54.712,43.104 54.966,43.104 ; 54.712,43.205 54.762,43.205 ; 54.712,43.231 54.762,43.231 ; 54.712,43.256 54.864,43.256 ; 54.712,43.485 54.788,43.485 ; 54.712,43.764 54.813,43.764 ; 54.737,36.855 54.813,36.855 ; 54.737,37.313 54.813,37.313 ; 54.737,39.446 55.042,39.446 ; 54.737,39.472 55.042,39.472 ; 54.737,41.326 55.423,41.326 ; 54.737,41.351 55.448,41.351 ; 54.737,41.377 55.448,41.377 ; 54.737,42.621 57.099,42.621 ; 54.737,43.129 54.788,43.129 ; 54.737,43.155 54.788,43.155 ; 54.737,43.18 54.864,43.18 ; 54.737,43.307 54.839,43.307 ; 54.737,43.536 54.788,43.536 ; 54.737,43.561 54.788,43.561 ; 54.737,43.586 54.788,43.586 ; 54.737,43.612 54.788,43.612 ; 54.762,36.83 54.788,36.83 ; 54.762,36.881 54.813,36.881 ; 54.762,36.906 54.839,36.906 ; 54.762,37.287 54.839,37.287 ; 54.762,37.744 56.845,37.744 ; 54.762,39.421 55.042,39.421 ; 54.762,41.402 55.474,41.402 ; 54.762,41.427 55.499,41.427 ; 54.762,41.453 55.524,41.453 ; 54.762,43.282 54.839,43.282 ; 54.762,43.79 54.889,43.79 ; 54.788,36.576 54.915,36.576 ; 54.788,36.932 54.839,36.932 ; 54.788,36.957 54.839,36.957 ; 54.788,36.982 54.864,36.982 ; 54.788,37.262 54.864,37.262 ; 54.788,37.719 56.82,37.719 ; 54.788,39.37 55.067,39.37 ; 54.788,39.395 55.067,39.395 ; 54.788,41.478 55.524,41.478 ; 54.788,41.504 55.55,41.504 ; 54.788,42.647 57.15,42.647 ; 54.788,43.002 54.889,43.002 ; 54.813,37.008 54.991,37.008 ; 54.813,37.033 54.915,37.033 ; 54.813,39.345 55.093,39.345 ; 54.813,41.529 55.575,41.529 ; 54.813,41.554 55.601,41.554 ; 54.813,42.672 57.226,42.672 ; 54.813,43.028 54.889,43.028 ; 54.813,43.053 54.915,43.053 ; 54.813,43.129 54.889,43.129 ; 54.813,43.155 54.966,43.155 ; 54.813,43.205 54.889,43.205 ; 54.813,43.231 54.889,43.231 ; 54.813,43.815 54.966,43.815 ; 54.839,36.551 54.991,36.551 ; 54.839,37.059 54.889,37.059 ; 54.839,37.084 54.915,37.084 ; 54.839,37.694 57.658,37.694 ; 54.839,39.294 55.118,39.294 ; 54.839,39.319 55.118,39.319 ; 54.839,41.58 55.626,41.58 ; 54.839,41.605 55.651,41.605 ; 54.839,41.631 55.677,41.631 ; 54.839,42.901 54.864,42.901 ; 54.839,42.926 54.889,42.926 ; 54.839,42.951 54.889,42.951 ; 54.839,42.977 54.889,42.977 ; 54.839,43.078 54.94,43.078 ; 54.864,37.109 54.915,37.109 ; 54.864,37.135 54.915,37.135 ; 54.864,37.16 54.94,37.16 ; 54.864,39.268 55.143,39.268 ; 54.864,41.656 55.702,41.656 ; 54.864,41.681 55.728,41.681 ; 54.864,42.697 57.277,42.697 ; 54.889,37.186 54.94,37.186 ; 54.889,37.211 55.042,37.211 ; 54.889,37.668 57.633,37.668 ; 54.889,39.243 55.169,39.243 ; 54.889,41.707 55.728,41.707 ; 54.889,41.732 55.753,41.732 ; 54.889,43.84 55.042,43.84 ; 54.915,36.525 55.067,36.525 ; 54.915,36.982 55.042,36.982 ; 54.915,37.236 54.991,37.236 ; 54.915,39.218 55.194,39.218 ; 54.915,41.758 55.778,41.758 ; 54.915,41.783 55.804,41.783 ; 54.915,42.723 57.607,42.723 ; 54.915,43.129 54.966,43.129 ; 54.94,37.643 57.582,37.643 ; 54.94,39.192 55.22,39.192 ; 54.94,41.808 55.829,41.808 ; 54.94,43.028 54.966,43.028 ; 54.94,43.18 54.966,43.18 ; 54.966,36.957 55.169,36.957 ; 54.966,38.506 57.455,38.506 ; 54.966,39.167 55.245,39.167 ; 54.966,41.834 55.88,41.834 ; 54.966,41.859 55.905,41.859 ; 54.966,42.748 57.556,42.748 ; 54.966,42.901 54.991,42.901 ; 54.966,42.926 55.042,42.926 ; 54.966,42.951 55.042,42.951 ; 54.966,42.977 55.042,42.977 ; 54.966,43.002 55.016,43.002 ; 54.966,43.866 55.118,43.866 ; 54.991,36.5 55.143,36.5 ; 54.991,36.932 55.067,36.932 ; 54.991,37.186 55.093,37.186 ; 54.991,37.617 57.531,37.617 ; 54.991,39.141 55.296,39.141 ; 54.991,41.885 55.931,41.885 ; 54.991,41.91 55.956,41.91 ; 55.016,36.805 55.093,36.805 ; 55.016,36.83 55.093,36.83 ; 55.016,36.855 55.067,36.855 ; 55.016,36.881 55.067,36.881 ; 55.016,36.906 55.067,36.906 ; 55.016,39.116 55.321,39.116 ; 55.016,41.935 55.982,41.935 ; 55.016,41.961 56.007,41.961 ; 55.016,42.774 57.506,42.774 ; 55.016,43.891 55.194,43.891 ; 55.042,36.703 55.118,36.703 ; 55.042,36.728 55.093,36.728 ; 55.042,36.754 55.093,36.754 ; 55.042,36.779 55.093,36.779 ; 55.042,37.16 55.143,37.16 ; 55.042,37.592 57.48,37.592 ; 55.067,36.474 55.245,36.474 ; 55.067,39.091 55.372,39.091 ; 55.067,42.799 57.455,42.799 ; 55.093,36.932 55.118,36.932 ; 55.093,37.135 55.194,37.135 ; 55.093,37.567 57.429,37.567 ; 55.093,39.065 55.423,39.065 ; 55.118,36.982 55.194,36.982 ; 55.118,38.532 57.48,38.532 ; 55.118,42.824 57.379,42.824 ; 55.118,43.917 55.296,43.917 ; 55.143,36.449 55.321,36.449 ; 55.143,37.008 55.22,37.008 ; 55.143,37.109 55.22,37.109 ; 55.143,37.541 57.353,37.541 ; 55.143,39.04 55.499,39.04 ; 55.169,37.033 55.22,37.033 ; 55.169,37.059 55.22,37.059 ; 55.169,37.084 55.22,37.084 ; 55.194,39.014 55.575,39.014 ; 55.194,42.85 57.328,42.85 ; 55.194,43.942 55.397,43.942 ; 55.22,37.516 57.302,37.516 ; 55.245,36.424 55.448,36.424 ; 55.245,38.557 57.48,38.557 ; 55.245,38.989 55.702,38.989 ; 55.245,42.875 57.252,42.875 ; 55.27,36.703 55.347,36.703 ; 55.27,36.728 55.321,36.728 ; 55.27,36.754 55.321,36.754 ; 55.27,36.779 55.296,36.779 ; 55.27,36.957 55.347,36.957 ; 55.27,36.982 55.321,36.982 ; 55.27,37.008 55.321,37.008 ; 55.27,37.49 57.226,37.49 ; 55.296,36.678 55.575,36.678 ; 55.296,36.906 55.448,36.906 ; 55.296,36.932 55.372,36.932 ; 55.296,37.033 55.347,37.033 ; 55.296,37.059 55.397,37.059 ; 55.296,38.964 57.633,38.964 ; 55.296,43.967 55.499,43.967 ; 55.321,37.084 55.55,37.084 ; 55.321,38.583 57.506,38.583 ; 55.321,42.901 57.175,42.901 ; 55.347,36.398 55.575,36.398 ; 55.347,36.652 55.55,36.652 ; 55.347,36.881 55.55,36.881 ; 55.347,37.465 57.15,37.465 ; 55.397,37.109 55.474,37.109 ; 55.397,38.938 56.032,38.938 ; 55.397,42.926 57.099,42.926 ; 55.397,43.993 55.651,43.993 ; 55.423,36.855 55.575,36.855 ; 55.423,38.608 57.506,38.608 ; 55.448,36.373 55.728,36.373 ; 55.448,37.44 57.074,37.44 ; 55.474,37.059 55.575,37.059 ; 55.474,42.951 57.023,42.951 ; 55.499,38.633 57.531,38.633 ; 55.524,36.703 55.601,36.703 ; 55.524,36.83 55.601,36.83 ; 55.524,37.033 55.601,37.033 ; 55.524,37.414 56.972,37.414 ; 55.524,38.913 55.88,38.913 ; 55.524,43.637 55.728,43.637 ; 55.524,44.018 55.855,44.018 ; 55.55,36.728 55.626,36.728 ; 55.55,36.805 55.626,36.805 ; 55.55,36.982 55.601,36.982 ; 55.55,37.008 55.601,37.008 ; 55.55,38.659 57.531,38.659 ; 55.55,43.612 55.626,43.612 ; 55.55,43.663 55.728,43.663 ; 55.575,36.347 55.956,36.347 ; 55.575,36.754 55.626,36.754 ; 55.575,36.779 55.626,36.779 ; 55.575,42.977 56.921,42.977 ; 55.575,43.383 55.728,43.383 ; 55.575,43.409 55.753,43.409 ; 55.601,43.18 55.677,43.18 ; 55.601,43.205 55.702,43.205 ; 55.601,43.231 55.702,43.231 ; 55.601,43.256 55.702,43.256 ; 55.601,43.282 55.702,43.282 ; 55.601,43.688 55.728,43.688 ; 55.626,38.684 57.531,38.684 ; 55.626,43.307 55.702,43.307 ; 55.626,43.434 55.753,43.434 ; 55.626,43.713 55.728,43.713 ; 55.651,37.389 56.871,37.389 ; 55.651,43.332 55.702,43.332 ; 55.651,43.358 55.728,43.358 ; 55.651,43.459 55.702,43.459 ; 55.651,43.485 55.702,43.485 ; 55.651,43.51 55.702,43.51 ; 55.651,43.536 55.702,43.536 ; 55.651,43.561 55.702,43.561 ; 55.651,43.586 55.702,43.586 ; 55.651,43.612 55.702,43.612 ; 55.677,38.71 57.556,38.71 ; 55.677,44.044 56.845,44.044 ; 55.702,43.002 56.82,43.002 ; 55.728,38.735 57.556,38.735 ; 55.753,36.322 56.769,36.322 ; 55.753,37.363 56.744,37.363 ; 55.753,43.713 55.804,43.713 ; 55.753,43.739 55.778,43.739 ; 55.778,43.586 56.007,43.586 ; 55.778,43.612 56.007,43.612 ; 55.778,43.637 55.855,43.637 ; 55.778,43.663 55.855,43.663 ; 55.778,43.688 55.829,43.688 ; 55.804,36.576 55.855,36.576 ; 55.804,36.601 55.855,36.601 ; 55.804,36.627 55.855,36.627 ; 55.804,36.652 55.855,36.652 ; 55.804,36.678 55.855,36.678 ; 55.804,36.703 55.855,36.703 ; 55.804,36.728 55.855,36.728 ; 55.804,36.754 55.855,36.754 ; 55.804,36.779 55.855,36.779 ; 55.804,36.805 55.855,36.805 ; 55.804,36.83 55.855,36.83 ; 55.804,36.855 55.855,36.855 ; 55.804,36.881 55.855,36.881 ; 55.804,36.906 55.855,36.906 ; 55.804,36.932 55.855,36.932 ; 55.804,36.957 55.855,36.957 ; 55.804,36.982 55.855,36.982 ; 55.804,37.008 55.855,37.008 ; 55.804,37.033 55.855,37.033 ; 55.804,38.76 57.582,38.76 ; 55.804,43.332 55.956,43.332 ; 55.829,43.307 55.931,43.307 ; 55.829,43.358 55.982,43.358 ; 55.829,43.739 55.956,43.739 ; 55.855,38.786 57.582,38.786 ; 55.855,43.028 56.667,43.028 ; 55.855,43.18 56.058,43.18 ; 55.855,43.205 56.083,43.205 ; 55.855,43.231 56.083,43.231 ; 55.855,43.256 55.931,43.256 ; 55.855,43.282 55.931,43.282 ; 55.855,43.383 55.982,43.383 ; 55.855,43.409 55.982,43.409 ; 55.855,43.434 55.905,43.434 ; 55.855,43.459 55.905,43.459 ; 55.855,43.485 55.931,43.485 ; 55.855,43.51 55.931,43.51 ; 55.855,43.536 55.982,43.536 ; 55.855,43.764 55.956,43.764 ; 55.855,44.069 56.642,44.069 ; 55.88,43.561 55.982,43.561 ; 55.88,43.637 56.007,43.637 ; 55.88,43.79 55.956,43.79 ; 55.905,38.811 57.582,38.811 ; 55.905,43.663 55.956,43.663 ; 55.905,43.688 55.931,43.688 ; 55.905,43.713 55.956,43.713 ; 55.905,43.815 55.982,43.815 ; 55.931,38.837 57.607,38.837 ; 55.931,43.84 56.134,43.84 ; 55.956,37.008 56.312,37.008 ; 55.956,37.033 56.337,37.033 ; 55.956,37.338 56.566,37.338 ; 55.956,43.866 56.134,43.866 ; 55.982,38.862 57.607,38.862 ; 55.982,43.256 56.058,43.256 ; 55.982,43.663 56.032,43.663 ; 55.982,43.688 56.032,43.688 ; 56.007,43.713 56.032,43.713 ; 56.007,43.739 56.058,43.739 ; 56.007,43.764 56.083,43.764 ; 56.007,43.79 56.109,43.79 ; 56.007,43.815 56.109,43.815 ; 56.007,43.891 56.109,43.891 ; 56.032,36.297 56.49,36.297 ; 56.032,38.887 57.607,38.887 ; 56.032,43.917 56.058,43.917 ; 56.083,38.913 57.633,38.913 ; 56.109,36.601 56.159,36.601 ; 56.109,36.627 56.159,36.627 ; 56.109,36.652 56.159,36.652 ; 56.109,36.678 56.159,36.678 ; 56.109,36.703 56.159,36.703 ; 56.109,36.728 56.159,36.728 ; 56.109,36.754 56.159,36.754 ; 56.109,36.779 56.159,36.779 ; 56.109,36.805 56.159,36.805 ; 56.109,36.83 56.159,36.83 ; 56.109,36.855 56.159,36.855 ; 56.109,36.881 56.159,36.881 ; 56.109,36.906 56.159,36.906 ; 56.109,36.932 56.159,36.932 ; 56.109,36.957 56.159,36.957 ; 56.109,36.982 56.159,36.982 ; 56.109,38.938 57.633,38.938 ; 56.109,40.437 56.515,40.437 ; 56.109,40.462 56.566,40.462 ; 56.109,40.488 56.591,40.488 ; 56.109,40.513 56.617,40.513 ; 56.109,40.538 56.667,40.538 ; 56.109,40.564 56.693,40.564 ; 56.109,40.589 56.718,40.589 ; 56.109,40.615 56.769,40.615 ; 56.109,40.64 56.794,40.64 ; 56.109,40.665 56.845,40.665 ; 56.109,40.691 56.871,40.691 ; 56.109,40.716 56.896,40.716 ; 56.109,40.742 56.947,40.742 ; 56.109,40.767 56.972,40.767 ; 56.109,40.792 57.023,40.792 ; 56.134,40.31 56.363,40.31 ; 56.134,40.335 56.388,40.335 ; 56.134,40.361 56.413,40.361 ; 56.134,40.386 56.439,40.386 ; 56.134,40.411 56.49,40.411 ; 56.134,40.818 57.048,40.818 ; 56.134,40.843 57.099,40.843 ; 56.134,40.869 57.125,40.869 ; 56.134,40.894 57.175,40.894 ; 56.134,40.919 57.226,40.919 ; 56.134,40.945 57.252,40.945 ; 56.134,40.97 57.302,40.97 ; 56.134,43.053 56.388,43.053 ; 56.159,40.234 56.261,40.234 ; 56.159,40.259 56.286,40.259 ; 56.159,40.284 56.312,40.284 ; 56.159,40.996 57.328,40.996 ; 56.159,41.021 57.379,41.021 ; 56.159,41.046 57.429,41.046 ; 56.159,41.072 57.48,41.072 ; 56.185,40.157 57.455,40.157 ; 56.185,40.183 57.404,40.183 ; 56.185,40.208 57.379,40.208 ; 56.185,41.097 57.531,41.097 ; 56.185,41.123 57.582,41.123 ; 56.185,41.148 57.658,41.148 ; 56.185,41.173 57.709,41.173 ; 56.21,40.107 57.506,40.107 ; 56.21,40.132 57.48,40.132 ; 56.21,41.199 57.785,41.199 ; 56.21,41.224 57.861,41.224 ; 56.21,41.25 57.937,41.25 ; 56.236,38.989 57.633,38.989 ; 56.236,40.056 57.556,40.056 ; 56.236,40.081 57.531,40.081 ; 56.236,41.275 58.039,41.275 ; 56.236,41.3 58.166,41.3 ; 56.236,41.326 58.877,41.326 ; 56.261,40.005 57.582,40.005 ; 56.261,40.03 57.556,40.03 ; 56.261,41.351 58.877,41.351 ; 56.261,41.377 58.877,41.377 ; 56.286,39.98 57.582,39.98 ; 56.286,41.402 58.852,41.402 ; 56.286,41.427 58.852,41.427 ; 56.286,41.453 58.826,41.453 ; 56.312,39.929 57.607,39.929 ; 56.312,39.954 57.607,39.954 ; 56.312,40.234 57.328,40.234 ; 56.312,41.478 58.826,41.478 ; 56.312,41.504 58.801,41.504 ; 56.337,39.903 57.607,39.903 ; 56.337,41.529 58.801,41.529 ; 56.337,41.554 58.776,41.554 ; 56.363,39.878 57.633,39.878 ; 56.363,41.58 58.776,41.58 ; 56.363,41.605 58.75,41.605 ; 56.388,39.853 57.633,39.853 ; 56.388,41.631 58.725,41.631 ; 56.388,41.656 58.725,41.656 ; 56.413,39.014 57.633,39.014 ; 56.413,39.827 57.633,39.827 ; 56.413,40.259 57.252,40.259 ; 56.413,41.681 58.699,41.681 ; 56.413,41.707 58.699,41.707 ; 56.439,36.982 56.515,36.982 ; 56.439,37.008 56.49,37.008 ; 56.439,39.802 57.633,39.802 ; 56.439,41.732 58.674,41.732 ; 56.439,41.758 58.649,41.758 ; 56.439,43.332 57.048,43.332 ; 56.464,36.957 56.54,36.957 ; 56.464,39.776 57.658,39.776 ; 56.464,41.783 58.649,41.783 ; 56.464,43.282 56.667,43.282 ; 56.464,43.307 56.82,43.307 ; 56.464,43.358 57.048,43.358 ; 56.49,36.906 56.566,36.906 ; 56.49,36.932 56.54,36.932 ; 56.49,39.751 57.658,39.751 ; 56.49,41.808 58.623,41.808 ; 56.49,41.834 58.598,41.834 ; 56.49,43.256 56.591,43.256 ; 56.515,36.881 56.591,36.881 ; 56.515,41.859 58.598,41.859 ; 56.515,41.885 58.572,41.885 ; 56.515,43.231 56.54,43.231 ; 56.54,36.347 56.921,36.347 ; 56.54,36.83 56.617,36.83 ; 56.54,36.855 56.591,36.855 ; 56.54,39.04 57.658,39.04 ; 56.54,39.726 57.658,39.726 ; 56.54,40.284 57.175,40.284 ; 56.54,41.91 58.547,41.91 ; 56.566,36.805 56.693,36.805 ; 56.566,39.7 57.658,39.7 ; 56.566,41.935 58.522,41.935 ; 56.566,41.961 58.522,41.961 ; 56.591,36.754 56.667,36.754 ; 56.591,36.779 56.693,36.779 ; 56.591,41.986 58.496,41.986 ; 56.617,36.551 56.642,36.551 ; 56.617,36.576 56.667,36.576 ; 56.617,36.601 56.667,36.601 ; 56.617,36.627 56.667,36.627 ; 56.617,36.652 56.667,36.652 ; 56.617,36.678 56.667,36.678 ; 56.617,36.703 56.667,36.703 ; 56.617,36.728 56.667,36.728 ; 56.617,39.675 57.658,39.675 ; 56.617,42.012 58.471,42.012 ; 56.617,42.037 58.445,42.037 ; 56.642,42.062 58.42,42.062 ; 56.667,36.83 56.718,36.83 ; 56.667,36.855 56.744,36.855 ; 56.667,39.065 57.658,39.065 ; 56.667,39.649 57.658,39.649 ; 56.667,42.088 58.395,42.088 ; 56.667,44.018 56.998,44.018 ; 56.693,36.881 56.744,36.881 ; 56.693,42.113 58.369,42.113 ; 56.693,42.139 58.369,42.139 ; 56.693,43.383 56.871,43.383 ; 56.718,36.906 56.769,36.906 ; 56.718,36.932 56.794,36.932 ; 56.718,39.624 57.683,39.624 ; 56.718,42.164 58.344,42.164 ; 56.744,36.957 56.794,36.957 ; 56.744,39.091 57.658,39.091 ; 56.744,42.189 58.318,42.189 ; 56.744,43.409 56.871,43.409 ; 56.744,43.688 56.972,43.688 ; 56.744,43.713 56.82,43.713 ; 56.769,36.373 57.074,36.373 ; 56.769,36.982 56.82,36.982 ; 56.769,37.008 56.845,37.008 ; 56.769,39.599 57.683,39.599 ; 56.769,40.31 56.972,40.31 ; 56.769,42.215 58.293,42.215 ; 56.769,43.434 56.896,43.434 ; 56.769,43.612 56.896,43.612 ; 56.769,43.637 57.099,43.637 ; 56.769,43.663 57.074,43.663 ; 56.794,42.24 58.268,42.24 ; 56.794,43.459 56.921,43.459 ; 56.82,42.266 58.242,42.266 ; 56.82,42.291 58.217,42.291 ; 56.845,37.719 56.972,37.719 ; 56.845,39.116 57.658,39.116 ; 56.845,42.316 58.166,42.316 ; 56.845,43.485 56.947,43.485 ; 56.871,39.573 57.683,39.573 ; 56.871,42.342 58.141,42.342 ; 56.871,43.51 56.972,43.51 ; 56.871,43.993 57.125,43.993 ; 56.896,42.367 58.115,42.367 ; 56.896,43.536 56.998,43.536 ; 56.921,37.744 56.947,37.744 ; 56.921,39.141 57.658,39.141 ; 56.921,42.393 58.09,42.393 ; 56.947,36.398 57.175,36.398 ; 56.947,39.548 57.683,39.548 ; 56.947,42.418 58.064,42.418 ; 56.947,43.561 57.023,43.561 ; 56.972,42.443 58.039,42.443 ; 56.972,43.383 57.048,43.383 ; 56.972,43.586 57.099,43.586 ; 56.998,37.719 57.709,37.719 ; 56.998,43.612 57.099,43.612 ; 56.998,43.688 57.048,43.688 ; 56.998,43.967 57.226,43.967 ; 57.023,39.167 57.658,39.167 ; 57.023,42.469 57.988,42.469 ; 57.048,37.744 57.76,37.744 ; 57.048,39.522 57.683,39.522 ; 57.048,42.494 57.963,42.494 ; 57.074,36.424 57.277,36.424 ; 57.074,36.906 57.15,36.906 ; 57.074,36.932 57.15,36.932 ; 57.074,36.957 57.15,36.957 ; 57.074,36.982 57.15,36.982 ; 57.074,37.77 57.81,37.77 ; 57.074,39.192 57.683,39.192 ; 57.074,42.52 57.937,42.52 ; 57.099,36.83 57.175,36.83 ; 57.099,36.855 57.15,36.855 ; 57.099,36.881 57.15,36.881 ; 57.099,37.008 57.15,37.008 ; 57.099,37.033 57.15,37.033 ; 57.099,37.059 57.175,37.059 ; 57.099,37.795 57.836,37.795 ; 57.099,42.545 57.887,42.545 ; 57.125,36.779 57.201,36.779 ; 57.125,36.805 57.175,36.805 ; 57.125,37.084 57.201,37.084 ; 57.125,37.821 57.201,37.821 ; 57.125,42.57 57.861,42.57 ; 57.125,43.942 57.328,43.942 ; 57.15,36.754 57.252,36.754 ; 57.15,37.109 57.226,37.109 ; 57.15,37.846 57.226,37.846 ; 57.15,39.218 57.683,39.218 ; 57.175,36.449 57.379,36.449 ; 57.175,37.135 57.302,37.135 ; 57.175,37.871 57.226,37.871 ; 57.175,42.596 57.81,42.596 ; 57.201,36.728 57.429,36.728 ; 57.201,37.16 57.404,37.16 ; 57.201,37.897 57.226,37.897 ; 57.201,42.621 57.785,42.621 ; 57.226,37.922 57.252,37.922 ; 57.226,39.243 57.683,39.243 ; 57.226,39.497 57.683,39.497 ; 57.226,43.917 57.404,43.917 ; 57.252,36.703 57.353,36.703 ; 57.252,42.647 57.734,42.647 ; 57.277,36.474 57.455,36.474 ; 57.277,37.821 57.861,37.821 ; 57.277,39.268 57.683,39.268 ; 57.302,37.846 57.912,37.846 ; 57.302,42.672 57.683,42.672 ; 57.328,37.135 57.429,37.135 ; 57.328,42.697 57.633,42.697 ; 57.328,43.891 57.48,43.891 ; 57.353,36.5 57.531,36.5 ; 57.353,36.754 57.455,36.754 ; 57.353,37.871 57.937,37.871 ; 57.353,39.294 57.683,39.294 ; 57.379,37.109 57.48,37.109 ; 57.379,37.897 57.988,37.897 ; 57.379,37.922 58.014,37.922 ; 57.404,36.779 57.48,36.779 ; 57.404,37.948 58.039,37.948 ; 57.404,39.319 57.683,39.319 ; 57.404,43.866 57.556,43.866 ; 57.429,36.805 57.506,36.805 ; 57.429,37.059 57.506,37.059 ; 57.429,37.084 57.48,37.084 ; 57.429,37.973 58.064,37.973 ; 57.455,36.525 57.607,36.525 ; 57.455,36.83 57.506,36.83 ; 57.455,36.855 57.506,36.855 ; 57.455,36.881 57.531,36.881 ; 57.455,36.982 57.531,36.982 ; 57.455,37.008 57.531,37.008 ; 57.455,37.033 57.506,37.033 ; 57.455,37.998 58.115,37.998 ; 57.455,38.024 58.141,38.024 ; 57.455,39.345 57.683,39.345 ; 57.48,36.906 57.531,36.906 ; 57.48,36.932 57.531,36.932 ; 57.48,36.957 57.531,36.957 ; 57.48,38.049 58.166,38.049 ; 57.48,38.075 58.191,38.075 ; 57.48,43.84 57.633,43.84 ; 57.506,38.1 57.531,38.1 ; 57.506,42.926 57.709,42.926 ; 57.531,36.551 57.658,36.551 ; 57.531,39.37 57.683,39.37 ; 57.531,42.901 57.658,42.901 ; 57.556,43.104 57.887,43.104 ; 57.556,43.129 57.937,43.129 ; 57.556,43.815 57.683,43.815 ; 57.582,36.576 57.734,36.576 ; 57.582,37.211 57.658,37.211 ; 57.582,37.236 57.633,37.236 ; 57.582,37.262 57.658,37.262 ; 57.582,37.287 57.709,37.287 ; 57.582,38.1 58.217,38.1 ; 57.582,39.395 57.683,39.395 ; 57.582,43.078 57.861,43.078 ; 57.607,37.16 57.683,37.16 ; 57.607,37.186 57.658,37.186 ; 57.607,38.125 57.658,38.125 ; 57.607,38.151 57.658,38.151 ; 57.607,42.951 57.734,42.951 ; 57.607,43.053 57.709,43.053 ; 57.607,43.79 57.76,43.79 ; 57.633,37.084 57.76,37.084 ; 57.633,37.109 57.81,37.109 ; 57.633,37.135 57.683,37.135 ; 57.633,37.313 57.785,37.313 ; 57.633,38.176 57.683,38.176 ; 57.633,38.202 57.683,38.202 ; 57.633,39.421 57.683,39.421 ; 57.658,36.601 57.785,36.601 ; 57.658,37.033 57.709,37.033 ; 57.658,37.059 57.709,37.059 ; 57.658,38.227 57.683,38.227 ; 57.658,38.252 57.709,38.252 ; 57.683,36.957 57.76,36.957 ; 57.683,36.982 57.734,36.982 ; 57.683,37.008 57.734,37.008 ; 57.683,38.125 58.242,38.125 ; 57.683,38.278 57.709,38.278 ; 57.683,38.303 57.709,38.303 ; 57.683,38.329 57.709,38.329 ; 57.683,42.977 57.76,42.977 ; 57.683,43.764 57.81,43.764 ; 57.709,36.627 57.836,36.627 ; 57.709,36.881 57.785,36.881 ; 57.709,36.906 57.76,36.906 ; 57.709,36.932 57.76,36.932 ; 57.709,37.338 57.836,37.338 ; 57.709,38.151 57.734,38.151 ; 57.709,38.176 57.734,38.176 ; 57.709,43.002 57.785,43.002 ; 57.734,36.855 57.76,36.855 ; 57.734,43.028 57.81,43.028 ; 57.76,37.135 57.887,37.135 ; 57.76,37.363 57.861,37.363 ; 57.76,43.053 57.861,43.053 ; 57.76,43.739 57.861,43.739 ; 57.785,36.652 57.912,36.652 ; 57.785,38.151 58.268,38.151 ; 57.785,43.155 58.064,43.155 ; 57.81,37.16 57.912,37.16 ; 57.81,38.176 58.293,38.176 ; 57.81,43.18 58.09,43.18 ; 57.81,43.713 57.912,43.713 ; 57.836,36.678 57.963,36.678 ; 57.836,37.389 57.861,37.389 ; 57.836,38.202 58.318,38.202 ; 57.836,38.227 58.344,38.227 ; 57.836,42.748 58.039,42.748 ; 57.836,42.774 57.988,42.774 ; 57.836,42.799 57.937,42.799 ; 57.836,42.824 57.912,42.824 ; 57.836,42.85 57.912,42.85 ; 57.836,42.875 57.887,42.875 ; 57.836,42.901 57.887,42.901 ; 57.836,42.926 57.887,42.926 ; 57.836,42.951 57.861,42.951 ; 57.836,42.977 57.861,42.977 ; 57.836,43.002 57.861,43.002 ; 57.836,43.028 57.861,43.028 ; 57.836,43.205 57.937,43.205 ; 57.861,37.186 57.912,37.186 ; 57.861,38.252 58.369,38.252 ; 57.861,43.231 57.937,43.231 ; 57.861,43.256 57.963,43.256 ; 57.861,43.282 57.963,43.282 ; 57.861,43.688 57.988,43.688 ; 57.887,36.703 58.014,36.703 ; 57.887,38.278 58.395,38.278 ; 57.887,38.303 58.42,38.303 ; 57.887,43.307 57.988,43.307 ; 57.887,43.332 57.988,43.332 ; 57.887,43.358 58.014,43.358 ; 57.912,38.329 58.445,38.329 ; 57.912,38.354 58.471,38.354 ; 57.912,43.383 58.014,43.383 ; 57.912,43.409 58.014,43.409 ; 57.912,43.663 58.039,43.663 ; 57.937,36.728 58.064,36.728 ; 57.937,38.379 58.471,38.379 ; 57.937,43.434 58.014,43.434 ; 57.937,43.459 58.014,43.459 ; 57.937,43.485 57.988,43.485 ; 57.963,37.465 58.014,37.465 ; 57.963,37.49 58.039,37.49